# Altium PCB LoRaWAN CO2 measurement Device.PcbDoc
Units mm, origin at the board's own origin, x right, y up, seen from the top; angles counter-clockwise.
Board outline 153.74 x 66.24 mm, 2 copper layers (Top, Bottom); 61 components, 40 nets, 189 pads, 89 vias.
Unrouted connection lines stored in the file: 93.
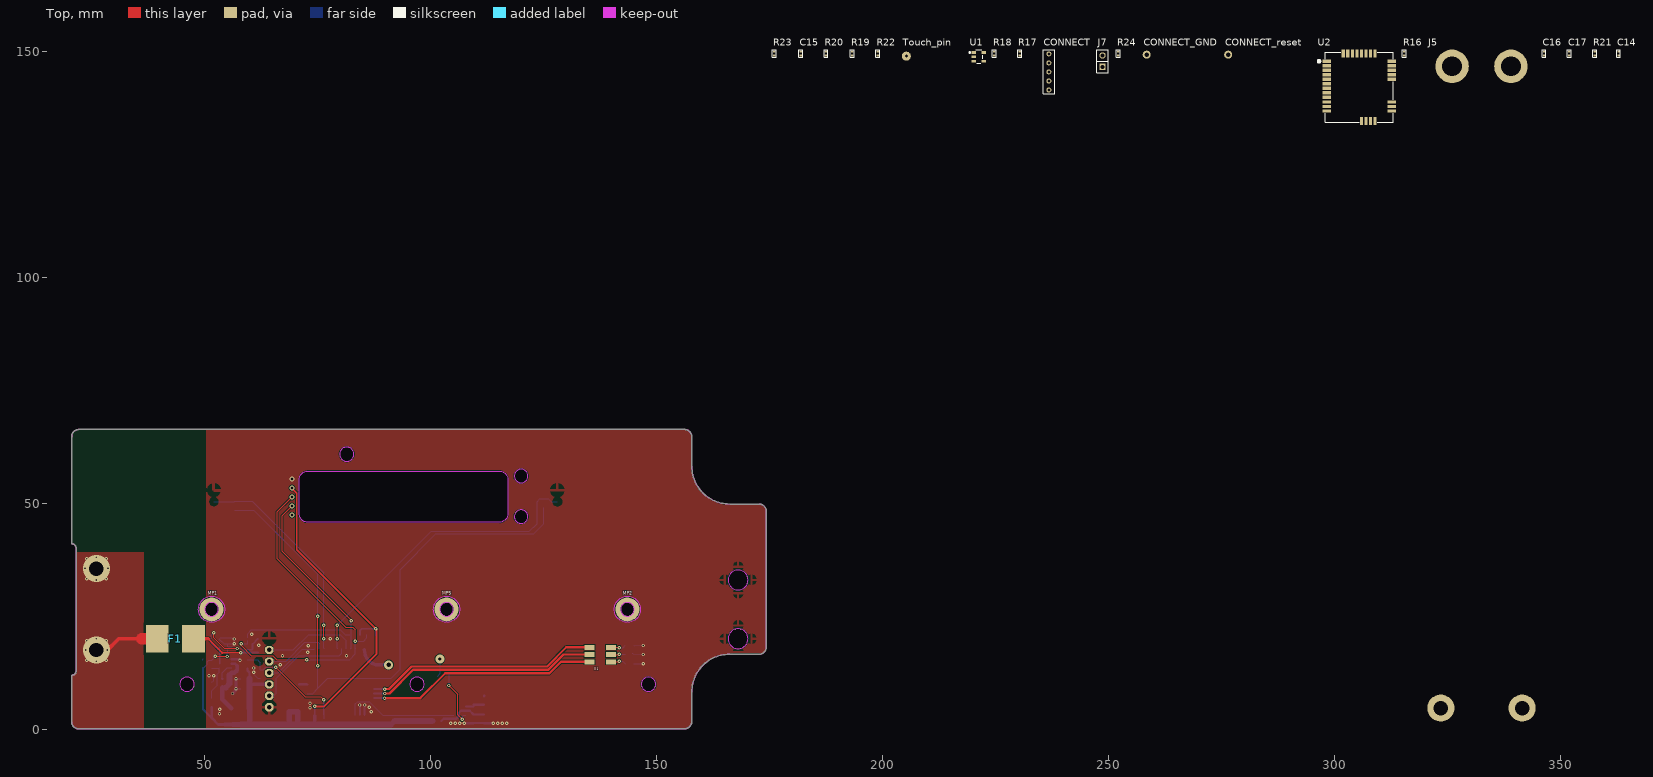
[diagram p0: Top view]
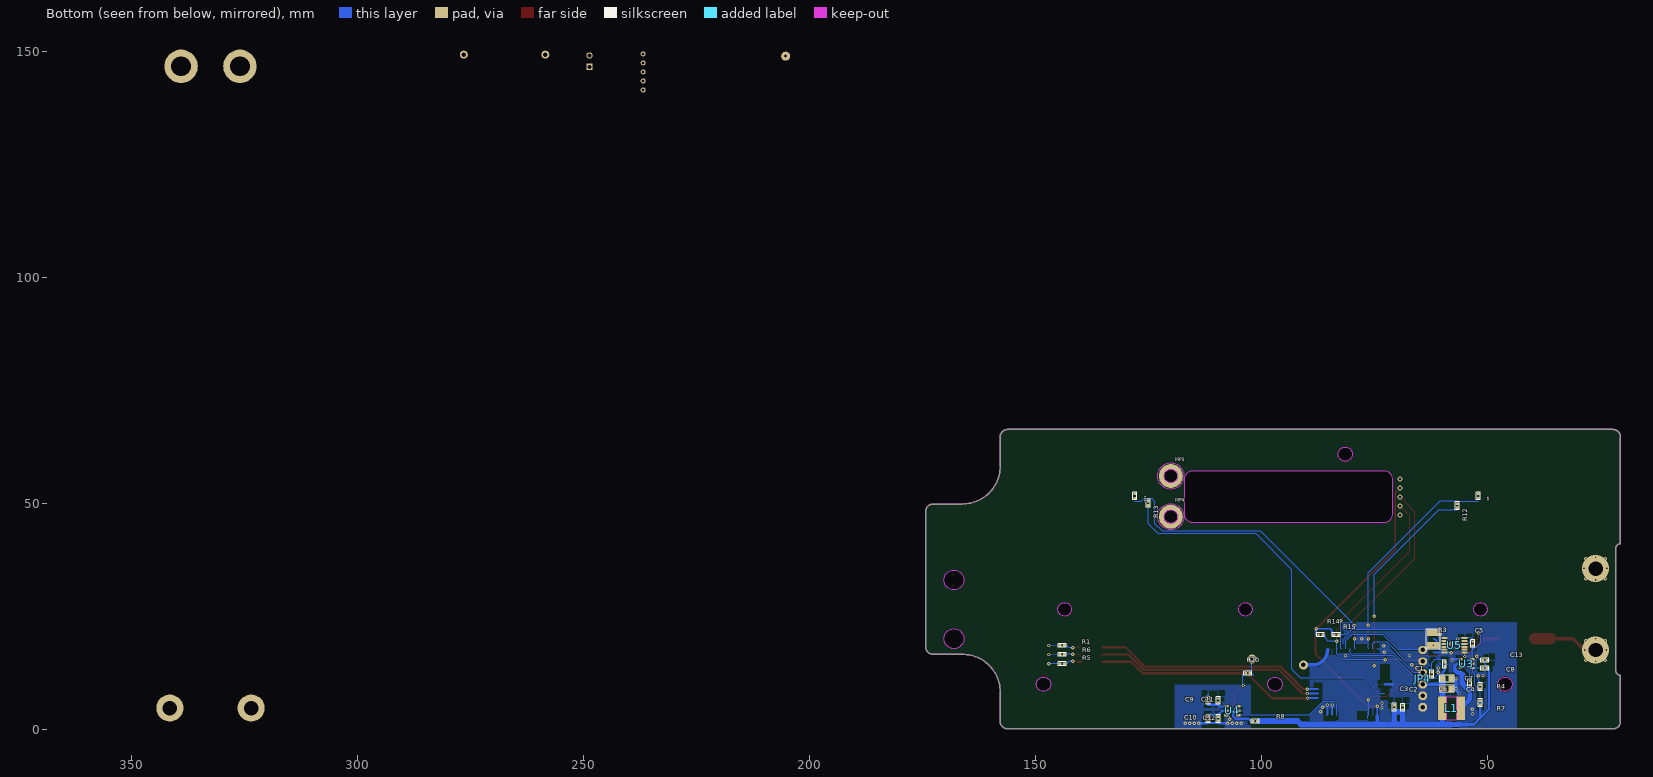
[diagram p1: Bottom view, seen from below]

## Layer stack, top to bottom
Top Solder: solder mask 0.0102, Solder Resist, Dk 3.5
Top: signal copper 0.035
Dielectric 1: dielectric 0.32, FR-4, Dk 4.8
Bottom: signal copper 0.035
Bottom Solder: solder mask 0.0102, Solder Resist, Dk 3.5

## Board outline
21.526,12.914 21.526,39.973 ccw(c20.537,40.011) 20.51,41 20.51,64.611 cw(c22.165,64.646) 22.13,66.3 156.13,66.3 cw(c156.13,64.681) 157.748,64.681 157.748,58.181 ccw(c166.129,58.181) 166.129,49.8 172.63,49.8 cw(c172.63,48.181) 174.249,48.181 174.249,18.181 cw(c172.63,18.181) 172.63,16.562 166.129,16.562 ccw(c166.129,8.181) 157.748,8.181 157.748,1.681 cw(c156.13,1.681) 156.13,0.062 22.13,0.062 cw(c22.129,1.681) 20.51,1.68 20.51,11.938 ccw(c20.561,12.902)
cut-out: 72.821,57.073 115.239,57.073 cw(c115.176,55.232) 117.017,55.168 117.017,47.548 cw(c115.176,47.612) 115.112,45.77 72.694,45.77 cw(c72.758,47.612) 70.916,47.675 70.916,55.295 cw(c72.758,55.232)
cut-out: 168,17.8 ccw(c168,20) 170.2,20 ccw(c168,20) 168,22.2 ccw(c168,20) 165.8,20 ccw(c168,20)
cut-out: 168,30.8 ccw(c168,33) 170.2,33 ccw(c168,33) 168,35.2 ccw(c168,33) 165.8,33 ccw(c168,33)
cut-out: 46.076,8.344 ccw(c46.076,9.931) 47.663,9.931 ccw(c46.076,9.931) 46.076,11.519 ccw(c46.076,9.931) 44.488,9.931 ccw(c46.076,9.931)
cut-out: 81.407,59.245 ccw(c81.407,60.833) 82.995,60.833 ccw(c81.407,60.833) 81.407,62.42 ccw(c81.407,60.833) 79.819,60.833 ccw(c81.407,60.833)
cut-out: 148.184,8.344 ccw(c148.184,9.931) 149.771,9.931 ccw(c148.184,9.931) 148.184,11.519 ccw(c148.184,9.931) 146.596,9.931 ccw(c148.184,9.931)
cut-out: 96.952,8.344 ccw(c96.952,9.931) 98.539,9.931 ccw(c96.952,9.931) 96.952,11.519 ccw(c96.952,9.931) 95.364,9.931 ccw(c96.952,9.931)
cut-out: 103.5,25 ccw(c103.5,26.5) 105,26.5 ccw(c103.5,26.5) 103.5,28 ccw(c103.5,26.5) 102,26.5 ccw(c103.5,26.5)
cut-out: 120,45.5 ccw(c120,47) 121.5,47 ccw(c120,47) 120,48.5 ccw(c120,47) 118.5,47 ccw(c120,47)
cut-out: 51.5,25 ccw(c51.5,26.5) 53,26.5 ccw(c51.5,26.5) 51.5,28 ccw(c51.5,26.5) 50,26.5 ccw(c51.5,26.5)
cut-out: 143.5,25 ccw(c143.5,26.5) 145,26.5 ccw(c143.5,26.5) 143.5,28 ccw(c143.5,26.5) 142,26.5 ccw(c143.5,26.5)
cut-out: 120,54.5 ccw(c120,56) 121.5,56 ccw(c120,56) 120,57.5 ccw(c120,56) 118.5,56 ccw(c120,56)

## Design rules (kind name [scope] priority, off if disabled: settings)
BoardOutlineClearance mdCopperDimension [All] p1: gap=0.254 ignorepadtopadclearanceinfootprint=FALSE except(0: Arc-SplitContinuation Track-SplitContinuation SMDPad-SplitContinuation THPad-SplitContinuation Via-SplitContinuation Fill-SplitContinuation Poly-SplitContinuation Region-SplitContinuation Text-SplitContinuation; 0.152: Poly-OutlineEdge Poly-CavityEdge Poly-CutoutEdge Poly-SplitBarrior)
Clearance "Clearance (Same Net)" [All] p1: gap=0.152 ignorepadtopadclearanceinfootprint=FALSE
Clearance [All] p2: gap=0.152 ignorepadtopadclearanceinfootprint=FALSE
HoleSize [All] p1: absolutevalues=TRUE maxlimit=2540 minlimit=0.3 maxpercent=80.000 minpercent=20.000
HoleToHoleClearance mdDrill [All] p1: gap=0.152 allowstackedmicrovias=TRUE
MinimumSolderMaskSliver [All] p1 off: minsoldermaskwidth=0.254
PasteMaskExpansion Expansion_SMDPaste_OFF [InPadClass('SMDPaste_OFF')] p1: expansion=0
PasteMaskExpansion mlMinCreamFrame [All] p2: expansion=-0.025
PolygonConnect PolygonConnect_For_PolygonThermal_ON_Width160000_Gap250000 [InPolygonClass('PolygonThermal_ON_Width160000_Gap250000') vs Not IsVia] p1: connectstyle=Relief reliefconductorwidth=0.406 reliefentries=4 polygonreliefangle="90 Angle" airgapwidth=0.635
PolygonConnect PolygonConnect_For_PolygonThermal_ON_Width60000_Gap250000 [InPolygonClass('PolygonThermal_ON_Width60000_Gap250000') vs Not IsVia] p2: connectstyle=Relief reliefconductorwidth=0.152 reliefentries=4 polygonreliefangle="90 Angle" airgapwidth=0.635
PolygonConnect PolygonConnect_For_PolygonThermal_ON_Width100000_Gap250000 [InPolygonClass('PolygonThermal_ON_Width100000_Gap250000') vs Not IsVia] p3: connectstyle=Relief reliefconductorwidth=0.254 reliefentries=4 polygonreliefangle="90 Angle" airgapwidth=0.635
PolygonConnect PolygonConnect_For_PolygonThermal_ON_Width240000_Gap250000 [InPolygonClass('PolygonThermal_ON_Width240000_Gap250000') vs Not IsVia] p4: connectstyle=Relief reliefconductorwidth=0.61 reliefentries=4 polygonreliefangle="90 Angle" airgapwidth=0.635
PolygonConnect ThermalVias [IsVia] p5: connectstyle=Direct reliefconductorwidth=0.254 reliefentries=4 polygonreliefangle="90 Angle" airgapwidth=0.254
PolygonConnect [All] p6: connectstyle=Relief reliefconductorwidth=0.254 reliefentries=4 polygonreliefangle="90 Angle" airgapwidth=0.254
RoutingVias [All] p1: holewidth=0.3 width=0.706 viastyle="Through Hole" minholewidth=0.3 minwidth=0.706 maxholewidth=2.54 maxwidth=2.54
SolderMaskExpansion Expansion_SMDSolder_OFF [InPadClass('SMDSolder_OFF')] p1: expansion=0 istentingtop=FALSE
SolderMaskExpansion mlMinStopFrame [All] p2: expansion=0.051 istentingtop=FALSE
Width [All] p1: maxlimit=0.254 minlimit=0.152 preferedwidth=0.152
26 further rules are at their usual default settings.

## Classes and differential pairs
polygon class PolygonThermal_ON_Width160000_Gap250000: Polygon_1_Net_F1
polygon class PolygonThermal_ON_Width60000_Gap250000: Polygon_3_Net_GND
polygon class PolygonThermal_ON_Width100000_Gap250000: Polygon_2_Net_GND
polygon class PolygonThermal_ON_Width240000_Gap250000: Polygon_1_Net_GND
pad class SMDPaste_OFF: MP1-1 MP2-1 MP3-1 MP4-1 MP5-1

## Components (designator, comment, footprint, x,y, rotation, side; value= is the part's Value field where it differs from the comment)
C1 "CAPACITOR NP" sc0402 62.245,12.156 r90 bottom value=100nF
C2 "CAPACITOR NP" sc0402 68.67,4.781 r270 bottom value=100nF
C3 "CAPACITOR NP" sc0402 70.564,4.806 r270 bottom value=1uF
C4 "CAPACITOR NP" sc0402 53.848,10.16 r90 bottom value=100nF
C5 "CAPACITOR NP" sc0402 53.213,18.923 r90 bottom value=100nF
C6 "CAPACITOR NP" sc0805 58.928,8.89 r180 bottom value=22uF
C7 "CAPACITOR NP" sc0805 58.928,11.176 r180 bottom value=22uF
C8 "CAPACITOR NP" sc0402 50.546,13.462 r180 bottom value=100pF
C9 "CAPACITOR NP" sc0402 111.76,6.35 r270 bottom value=1uF
C10 "CAPACITOR NP" sc0402 111.76,2.286 r90 bottom value=1uF
C11 "CAPACITOR NP" sc0402 109.474,6.35 r270 bottom value=100pF
C12 "CAPACITOR NP" sc0402 109.474,2.286 r90 bottom value=100pF
C13 "CAPACITOR NP" sc0402 50.546,15.24 r0 bottom value=10uF
C14 "CAPACITOR NP" sc0402 362.807,149.479 r90 top value=56pF
C15 "CAPACITOR NP" sc0402 181.864,149.479 r90 top value=1uF
C16 "CAPACITOR NP" sc0402 346.329,149.479 r90 top value=2.4pF_NC
C17 "CAPACITOR NP" sc0402 351.917,149.479 r90 top value=2.4pF_NC
CONNECT "J2" circle1*5_0.7_1.106 236.76,141.415 r90 top
CONNECT_GND "J6" circle1*1_1.016_1.788 258.413,149.225 r90 top
CONNECT_reset "J1" circle1*1_1.016_1.788 276.447,149.225 r90 top
D1 "LED-RGBBRG" LED-TRICOLOR-5050 137.5,16.5 r180 top
F1 "0031.7701.11" FUSE_0031.7701.11_SCH 43.5,20 r0 top
J5 "Battery" Battery_Con 332.486,75.66 r90 top
J7 "CONN-2" SIP-2P 248.634,147.796 r90 top value=2PIN
JP4 "PINHD-1X6CB" 1X06-CLEANBIG 64.261,11.188 r90 bottom
L1 "SD14-6R9-R" IND_CB_SD14 57.912,4.572 r180 bottom
MP1 "M2 x 3mm" WA-SMSI_9774030243 51.5,26.5 r0 top
MP2 "M2 x 3mm" WA-SMSI_9774030243 143.5,26.5 r0 top
MP3 "M2 x 3mm" WA-SMSI_9774030243 120,56 r180 bottom
MP4 "M2 x 3mm" WA-SMSI_9774030243 120,47 r180 bottom
MP5 "M2 x 3mm" WA-SMSI_9774030243 103.5,26.5 r0 top
R1 "RESISTOR" sr0402 144,18.5 r0 bottom value=22
R2 "RESISTOR" sr0402 59.436,14.351 r90 bottom value=10K
R3 "RESISTOR" sr1210 61.964,18.537 r90 bottom value=0.1
R4 "RESISTOR" sr0402 51.562,9.398 r90 bottom value=62K
R5 "RESISTOR" sr0402 144,14.5 r0 bottom value=22
R6 "RESISTOR" sr0402 144,16.51 r0 bottom value=51
R7 "RESISTOR" sr0402 51.562,5.842 r270 bottom value=180K
R8 "RESISTOR" sr0402 101.346,1.778 r0 bottom value=41.2
R9 "NTC-RESISTOR" sr0402 52,51.6 r270 bottom value=10K
R10 "RESISTOR" sr0402 102.997,12.319 r180 bottom value=470
R11 "NTC-RESISTOR" sr0402 128,51.6 r270 bottom value=10K
R12 "RESISTOR" sr0402 56.642,49.403 r270 bottom value=10K
R13 "RESISTOR" sr0402 125,50 r270 bottom value=10K
R14 "RESISTOR" sr0402 86.868,20.86 r0 bottom value=10K
R15 "RESISTOR" sr0402 83.376,20.86 r0 bottom value=10K
R16 "RESISTOR" sr0402 315.373,149.479 r90 top value=2K
R17 "RESISTOR" sr0402 230.283,149.479 r90 top value=1M
R18 "RESISTOR" sr0402 224.695,149.479 r90 top value=1M
R19 "RESISTOR" sr0402 193.294,149.479 r90 top value=0
R20 "RESISTOR" sr0402 187.452,149.479 r90 top value=0
R21 "RESISTOR" sr0402 357.505,149.479 r90 top value=0
R22 "RESISTOR" sr0402 198.882,149.479 r90 top value=1M
R23 "RESISTOR" sr0402 176.022,149.479 r90 top value=1M
R24 "RESISTOR" sr0402 252.095,149.479 r90 top value=10K
Touch_pin "J3" circle1*1_0.7 205.232,148.907 r90 top
U1 "TLV840" TLV840_SOT-23-5_L2.9-W1.6-P0.95-LS2.8-BR 220.154,149.701 r0 top
U2 "RAK3172" RAK3172 305.435,142.018 r0 top
U3 "AP63200WU-7" TSOT26_DIO 54.61,14.478 r0 bottom
U4 "IQS228B00000000TSR" TSOT23-6_AZQ 106.426,4.064 r0 bottom
U5 "LTC2945IMSTRPBF" MSOP-12_MS_LIT 57.277,18.542 r0 bottom

## Footprints (in the part's own frame and the unit in brackets; to place one, negate y for a bottom-side part, rotate by r counter-clockwise, add the part's x,y. Pads: shape width x height; smd on the part's side, far side on the other; paste and mask are expansions set on the pad)
1X06-CLEANBIG [mil] "1X06-CLEANBIG"
  oct 70x70 / inner round 64.67 / far side oct 70x70 hole 40: 1(-250,0) 2(-150,0) 3(-50,0) 4(50,0) 5(150,0) 6(250,0)
  body extent -283,-33 283,33, height 50
Battery_Con [mm] "Battery"
  round 6 hole 3.2: 1(-71,8.999) 2(-71,-8.999)
  round 7.4 hole 4.4: 3(71,-6.501) 4(71,6.499)
circle1*1_0.7 [mm]
  round 2 / inner round 1.106 / far side round 2 hole 0.7 mask+0.102: 1(0,0)
circle1*1_1.016_1.788 [mil]
  round 70 hole 40: 1(0,0)
circle1*5_0.7_1.106 [mm]
  round 1.106 hole 0.7: 1(0,0) 2(2,0) 3(4,0) 4(6,0) 5(8,0)
  silkscreen extent -0.87,-1.27 8.88,1.27
FUSE_0031.7701.11_SCH [mil] "FUSE_0031.7701.11_SCH"
  rect 197x236 smd: 1(-157.48,0) 2(157.48,0)
  body extent -256,-118 256,118, height 150
IND_CB_SD14 [mil] "IND_CB_SD14"
  rect 73x205 smd: 1(-80,0) 2(80,0)
  Top keep-out region: -42,103 42,103 42,-103 -42,-103
  Top keep-out region: -42,101 42,101 42,-101 -42,-101
  body extent -117,-103 117,103, height 150
LED-TRICOLOR-5050 [mm] "LED-TRICOLOR-5050"
  rect 2.2x1.1 smd: 1(-2.4,1.6) 2(-2.4,0) 3(-2.4,-1.6) 4(2.4,-1.6) 5(2.4,0) 6(2.4,1.6)
  body extent -3.5,-2.57 3.5,2.57, height 3.81
MSOP-12_MS_LIT [mil] "MSOP-12_MS_LIT"
  rect 52.5x17 smd: 1(-87.25,64) 2(-87.25,38.4) 3(-87.25,12.8) 4(-87.25,-12.8) 5(-87.25,-38.4) 6(-87.25,-64) 7(87.25,-64) 8(87.25,-38.4) 9(87.25,-12.8) 10(87.25,12.8) 11(87.25,38.4) 12(87.25,64)
  body extent -114,-72 114,72, height 50
RAK3172 [mm]
  rect 1.8x0.75 smd: 1(-7.2,5.75) 2(-7.2,4.75) 3(-7.2,3.75) 4(-7.2,2.75) 5(-7.2,1.75) 6(-7.2,0.75) 7(-7.2,-0.25) 8(-7.2,-1.25) 9(-7.2,-2.25) 10(-7.2,-3.25) 11(-7.2,-4.25) 12(-7.2,-5.25) 17(7.2,-5.25) 18(7.2,-4.25) 19(7.2,-3.25) 20(7.2,1.75) 21(7.2,2.75) 22(7.2,3.75) 23(7.2,4.75) 24(7.2,5.75)
  rect 0.75x1.8 smd: 13(0.5,-7.45) 14(1.5,-7.45) 15(2.5,-7.45) 16(3.5,-7.45) 25(3.5,7.45) 26(2.5,7.45) 27(1.5,7.45) 28(0.5,7.45) 29(-0.5,7.45) 30(-1.5,7.45) 31(-2.5,7.45) 32(-3.5,7.45)
  silkscreen extent -9.14,-7.75 7.5,7.75
sc0402 [mil] "SC0402"
  rect 20x22 smd: 1(-17.5,0) 2(17.5,0)
  silkscreen extent -34,-17 34,17, body extent -20,-10 20,10, height 20
sc0805 [mil] "SC0805"
  rect 45x50 smd mask+4: 1(35,0)
  rect 45x50 smd: 2(-35,0)
  silkscreen extent -63,-30 63,30, body extent -39,-25 39,25, height 33
SIP-2P [mil] "SIP-2P"
  rect 55x55 hole 36: 1(-50,0)
  round 55 hole 36: 2(50,0)
  silkscreen extent -100,-50 100,50
sr0402 [mil] "SR0402"
  rect 20x22 smd mask+2: 1(-17.5,0) 2(17.5,0)
  silkscreen extent -34,-17 34,17, body extent -20,-10 20,10, height 14
sr1210 [mil]
  rect 55x111 smd: 1(0,0) 2(110,0)
  silkscreen extent -33,-60 142,60
TLV840_SOT-23-5_L2.9-W1.6-P0.95-LS2.8-BR [mm]
  rect 1x0.6 smd paste+0 mask+0.05: 1(0,0) 2(0,-0.95) 3(0,-1.9) 4(2.2,-1.9) 5(2.2,0)
  silkscreen extent -1.06,-2.35 1.99,0.57
TSOT23-6_AZQ [mil] "TSOT23-6_AZQ"
  rect 39.5x22 smd: 1(-53.25,37.4) 2(-53.25,0) 3(-53.25,-37.4) 4(53.25,-37.4) 5(53.25,0) 6(53.25,37.4)
  body extent -73,-48 73,48, height 50
TSOT26_DIO [mil] "TSOT26_DIO"
  rect 35.5x20 smd: 1(-51.25,37.4) 2(-51.25,0) 3(-51.25,-37.4) 4(51.25,-37.4) 5(51.25,0) 6(51.25,37.4)
  body extent -69,-47 69,47, height 50
WA-SMSI_9774030243 [mm] "WA-SMSI_9774030243"
  rrect100% 5.3x5.3 smd paste+0: 1(0,0)
  Top keep-out region: 0,2.9 1.11,2.679 2.051,2.051 2.679,1.11 2.9,0 2.9,0 2.679,-1.11 2.051,-2.051 1.11,-2.679 0,-2.9 0,-2.9 -1.11,-2.679 -2.051,-2.051 -2.679,-1.11 -2.9,0 -2.9,0 -2.679,1.11 -2.051,2.051 -1.11,2.679 0,2.9
  body extent -2.85,-2.85 2.85,2.85, height 3.81

## Part data
C1 C2 C4 C5: library part 08070561, "Capacitor-10V-100nF-±10%-X5R -0402", MANUFACTURER=YAGEO, Part Number=CC0402KRX5R6BB104, TOLERANCE=±10%, VOLTAGE=10V, Classification="SMD Ceramic Capacitor", CODE=08070561, RAK Code=K3CA10402KA402, SYMNAME=CAP
C3 C9 C10 C15: library part 08070612, "Capacitor-10V-1uF-±10%-X5R-0402", MANUFACTURER=YAGEO, Part Number=CC0402KRX5R6BB105, TOLERANCE=±10%, VOLTAGE=10V, Classification="SMD Ceramic Capacitor", CODE=08070612, RAK Code=KRAKBJ08070612, SYMNAME=CAP
C6 C7: library part 0807B024, "Capacitor-25V-22uF-±20%-X5R-0805", MANUFACTURER=MURATA, Part Number=GRM21BR61E226ME44L, TOLERANCE=±20%, VOLTAGE=25V, Classification="SMD Ceramic Capacitor", CODE=0807B024, RAK Code=KRAKBJ0807B024, SYMNAME=CAP
C8 C11 C12: library part 08070450, "Capacitor-50V-100pF-±5%-NPO-0402", MANUFACTURER=YAGEO, Part Number=CC0402JRNPO9BN101, TOLERANCE=±5%, VOLTAGE=50V, Classification="SMD Ceramic Capacitor", CODE=08070450, RAK Code=KRAKBJ08070450, SYMNAME=CAP
C13: library part 0807C004, "Capacitor-10V-10uF-±20%-X5R-0402", MANUFACTURER=YAGEO, Part Number=CC0402MRX5R6BB106, TOLERANCE=±20%, VOLTAGE=10V, Classification="SMD Ceramic Capacitor", CODE=0807C004, RAK Code=KRAKBJ0807C004, SYMNAME=CAP
C14: library part 0807C002, "Capacitor-50V-56pF-±5%-COG-0402", MANUFACTURER=Murata, Part Number=GRM1555C1H560JA01D, TOLERANCE=±5%, VOLTAGE=50V, Classification="SMD Ceramic Capacitor", CODE=0807C002, RAK Code=K3CA56006JA402, SYMNAME=CAP
C16 C17: library part 0807A00M, "Capacitor-50V-2.4pF-±0.1pF-COG-0402", MANUFACTURER=MuRATA, Part Number=GRM1555C1H2R4BA01D, TOLERANCE=±0.1pF, VOLTAGE=50V, Classification="SMD Ceramic Capacitor", CODE=0807A00M, RAK Code=KRAKBJ0807A00M, SYMNAME=CAP
CONNECT: library part CONNECT
CONNECT_GND CONNECT_reset Touch_pin: library part CONNECT_1
D1: "LED-RGB  6 pin RGB LED (no common connector)     Packages:   PLCC-6  LED-TRICOLOR-5050 - No built-in IC    SparkFun Products:", DeviceName=BRG, DeviceSetName=LED-RGB, GateName_1=G$1, LibraryName=SparkFun-LED, PROD_ID=DIO-16048, SymbolName_1=LED-RGB-INDV
F1: MFR_NAME="Schurter Inc", COPYRIGHT="Copyright (C) 2024 Ultra Librarian. All rights reserved.", DeviceSetName=0031.7701.11, GateName_1=A, LibraryName=fusible, MANUFACTURER_PART_NUMBER=0031.7701.11, SymbolName_1=FUSE
J7: library part 14050028, "Conn Header-Male Pin-1*2Pos-Straight-PH2.54-Through Hole-Pole3.0mm-Mating6mm-Body2.54mm", MANUFACTURER=STZ01, Part Number=ST-PH-254-0087, Classification="Male and Female Header", CODE=14050028, RAK Code=KRAKBJ14050028
JP4: "PIN HEADER", DeviceName=CB, DeviceSetName=PINHD-1X6, GateName_1=A, LibraryName=holes_no_keep, SymbolName_1=PINHD6
L1: MFR_NAME="Eaton / Cooper Bussmann", COPYRIGHT="Copyright (C) 2024 Ultra Librarian. All rights reserved.", DeviceSetName=SD14-6R9-R, GateName_1=A, LibraryName=inductor_eaton_6.9uh, MANUFACTURER_PART_NUMBER=SD14-6R9-R, SymbolName_1=IND
MP1 MP2 MP3 MP4 MP5: library part WA-SMSI_9774XXX243_9774030243R, "WA-SMSI SMT Steel Spacer, M2 Thread Internal  Applications    Assembling of PCBs to housing and to other PCBs   For Distances from 1 to 8 mm   Fast and precise process   Strong holding forces and torques   Highest process reliability   Instant removable Polyimide Tape   Properties   Material Steel  Surface Tin  Ti M2  Solder Paste Thickness 150 碌m  Tightening Torque (Value) 0.2 N*m   General Information   Operating Temperature -55 up to +150 掳C       Details see: https://www.we-online.com/katalog/en/SMSI_SMT_STEEL_SPACER_M2_THREAD_INTERNAL   Updated by Ella Wu  2020-06-03 2021(C) Wurth Elektronik", DATASHEET-URL=https://www.we-online.com/catalog/datasheet/9774030243R.pdf, DeviceName=_9774030243R, DeviceSetName=WA-SMSI_9774XXX243, GateName_1=G$1, INNER-DIAMETER=2.8mm, INNER-THREAD-LENGTH=-, LibraryName=Eagle_WA-SMSI_rev21a, OUTER-DIAMETER=4.35mm, PART-NUMBER=9774030243R, PIN-LENGTH=3mm, SymbolName_1=WA-SMSI, THREAD=M2
R1 R5: library part 07090803, "Resistor-1/16W-22Ω-±5%-0402", MANUFACTURER=YAGEO, Part Number=RC0402JR-0722RL, TOLERANCE=±5%, Classification="Thick Film Resistor", CODE=07090803, RAK Code=KRAKBJ07090803
R2 R12 R13 R14 R15 R24: library part 07090867, "Resistor-1/16W-10KΩ-±1％-0402", MANUFACTURER=YAGEO, Part Number=RC0402FR-0710KL, TOLERANCE=±1%, Classification="Thick Film Resistor", CODE=07090867, RAK Code=K3RS01031FA402
R3: library part 0709C03J, "Resistor-1/2W-100mΩ-±1％-1210", MANUFACTURER=PANSONIC, Part Number=ERJ-14BSFR10U, TOLERANCE=±1%, Classification="Thick Film Resistor", CODE=0709C03J, RAK Code=KRAKBJ0709C03J
R4: library part 0709B003, "Resistor-1/16W-62KΩ-±1%-0402", MANUFACTURER=YAGEO, Part Number=RC0402FR-0762KL, TOLERANCE=±1%, Classification="Thick Film Resistor", CODE=0709B003, RAK Code=KRAKBJ0709B003
R6: library part 0709C00E, "Resistor-1/16W-51Ω-±5%-0402", MANUFACTURER=YAGEO, Part Number=RC0402JR-0751RL, TOLERANCE=±5%, Classification="Thick Film Resistor", CODE=0709C00E, RAK Code=KRAKBJ0709C00E
R7: library part 0709C01F, "Resistor-1/16W-180KΩ-±1%-0402", MANUFACTURER=YAGEO, Part Number=RC0402FR-07180KL, TOLERANCE=±1%, Classification="Thick Film Resistor", CODE=0709C01F
R8: library part 0709B01P, "Resistor-1/16W-41.2Ω-±1%-0402", MANUFACTURER=YAGEO, Part Number=RC0402FR-0741R2L, TOLERANCE=±1%, Classification="Thick Film Resistor", CODE=0709B01P, RAK Code=KRAKBJ0709B01P
R9 R11: library part 0705B001, "NTC Thermistor-10KΩ ±1％-B(25-50℃) 3380K-0402", MANUFACTURER=MURATA, Part Number=NCP15XH103F03RC, TOLERANCE=±1%, Classification="NTC Resistor", CODE=0705B001, RAK Code=KRAKBJ0705B001
R10: library part 0709C00L, "Resistor-1/16W-470Ω-±1%-0402", MANUFACTURER=YAGEO, Part Number=RC0402FR-07470RL, TOLERANCE=±1%, Classification="Thick Film Resistor", CODE=0709C00L, RAK Code=KRAKBJ0709C00L
R16: library part 0709C007, "Resistor-1/16W-2KΩ-±1%-0402", MANUFACTURER=YAGEO, Part Number=RC0402FR-072KL, TOLERANCE=±1%, Classification="Thick Film Resistor", CODE=0709C007, RAK Code=K3RS02021FA402
R17 R18 R22 R23: library part 0709C00Y, "Resistor-1/16W-1MΩ-±1％-0402", MANUFACTURER=YAGEO, Part Number=RC0402FR-071ML, TOLERANCE=±1%, Classification="Thick Film Resistor", CODE=0709C00Y, RAK Code=KRAKBJ0709C00Y
R19 R20 R21: library part 07090800, "Resistor-0Ω-1A-50mΩMAX-0402", MANUFACTURER=YAGEO, Part Number=RC0402JR-070RL, TOLERANCE="< 50mΩ", Classification="Thick Film Resistor", CODE=07090800, RAK Code=K3RS00001JA402
U3: MFR_NAME="Diodes Inc", COPYRIGHT="Copyright (C) 2024 Ultra Librarian. All rights reserved.", DeviceSetName=AP63200WU-7, GateName_1=A, LibraryName=AP63200, MANUFACTURER_PART_NUMBER=AP63200WU-7, SymbolName_1=AP63200WU-7, TYPE="Power Management"
U4: MFR_NAME=Azoteq, COPYRIGHT="Copyright (C) 2024 Ultra Librarian. All rights reserved.", DeviceSetName=IQS228B00000000TSR, GateName_1=A, LibraryName=Azeto, MANUFACTURER_PART_NUMBER=IQS228B00000000TSR, SymbolName_1=IQS228B_TS, TYPE=Interface
U5: MANUFACTURER_PART_NUMBER=LTC2945IMS#TRPBF, MFR_NAME="Analog Devices Inc", COPYRIGHT="Copyright (C) 2025 Ultra Librarian. All rights reserved.", DeviceSetName=LTC2945IMSTRPBF, GateName_1=A, LibraryName=ltc2945, SymbolName_1=LTC2945IMSTRPBF
U2: CODE=6310C01L

## Free pads (board coordinates)
  round 3 hole 3 unplated: MH1(51.5,26.5) MH1(103.5,26.5) MH1(120,47) MH1(120,56) MH1(143.5,26.5)
  round 3.175 hole 3.175 unplated: MH1(81.407,60.833) MH2(148.184,9.931) MH3(96.952,9.931) MH4(46.076,9.931)
  round 4.4 hole 4.4 unplated: MH1(168,20) MH1(168,33)

## Via types
v1: diameter 0.756/0.756 (per signal layer), hole 0.35, Top to Bottom, 80 vias
v2: diameter 1.106/1.106 (per signal layer), hole 0.7, Top to Bottom, 5 vias
v3: diameter 6/6 (per signal layer), hole 3.2, Top to Bottom, 2 vias
v4: diameter 2/2 (per signal layer), hole 0.7, Top to Bottom, 1 vias
v5: diameter 2/2 (per signal layer), hole 1, Top to Bottom, 1 vias

## Nets (pads, with @x,y where several pads share a name; then routed paths per layer and width w, separated by ;. In a path a pad name is that pad's centre, name@x,y a point inside that pad or via, vN(x,y) a via of type N, cw(c..) or ccw(c..) an arc to the next point about the centre after c; other vN are vias at no path point)
BOOT: J7.2 R24.1 U2.21
CVIN: F1.2 R3.2 U5.12 | length 15.9
  Top w0.406: 53.848,16.891 55.626,16.891 v1@57.887,16.891
  Top w0.508: 50.739,20 53.848,16.891
  Top w0.61: v1@57.887,16.891 v1(57.912,16.916) v1@57.888,16.892
  Top w0.813: F1.2 50.739,20
  Bottom w0.254: 61.765,16.916 61.964,17.115
  Bottom w0.406: v1(57.912,16.916) U5.12 61.765,16.916
CX1: R10.1 Touch_pin.1
DC_RESET: U1.1 U3.2
GND: C1.2 C2.2 C3.1 C5.2 C6.1 C7.1 C9.1 C10.1 C11.1 C12.1 C13.1 C15.1 C16.1 C17.1 CONNECT.1 CONNECT_GND.1 J5.3 J5.4 JP4.1 R1.1 R4.1 R5.1 R6.1 R9.2 R11.2 R19.1 R20.1 R23.1 R24.2 U1.3 U2.11 U2.17 U2.18 U2.28 U3.4 U4.2 U5.3 U5.4 U5.6 | length 37.3
  Bottom w0.152: 144.95,14.5 144.972,14.478 v1(147,14.5) ; 144.95,18.5 144.972,18.479 v1(147,18.5) ; v1(147,16.5) 144.95,16.51 ; 144.95,16.51 144.632,16.828 144.558,16.828 144.875,16.51 144.95,16.51
  Bottom w0.254: 49.53,15.568 49.596,15.502 49.596,15.24 ; 51.562,10.348 51.95,10.736 v1(51.95,11.76) ; 53.213,19.873 53.246,19.906 ; v1(56.896,8.89) C6.1@57.978,8.89 ; v1(56.896,11.176) C7.1@57.978,11.176 ; v1(60.833,12.573) 60.833,12.09 61.717,11.206 62.245,11.206 ; 53.246,19.906 54.285,18.867 U5.4 ; 53.246,19.906 53.508,20.168 U5.6 55.086,20.193 56.007,20.193 56.261,19.939 v1(56.515,19.939) v1(56.515,18.923) ; U5.4 56.459,18.867 v1(56.515,18.923) ; U5.4 U5.3 55.951,18.217 56.515,18.781 v1(56.515,18.923)
  Bottom w0.406: v1(60.833,12.573) v1(60.833,13.525)
  Bottom w0.508: U3.4 57.597,15.428 v1(57.785,15.24) ; v1(107.442,1.27) 109.408,1.27 109.474,1.336 111.76,1.336 111.826,1.27 v1(113.792,1.27) ; 111.76,7.3 111.826,7.366
  Bottom w0.75: v1(56.134,7.874) 56.896,8.636 v1(56.896,8.89) v1(56.896,11.176)
  other v1: 104.394,1.27 105.41,1.27 106.426,1.27 114.808,1.27 115.824,1.27 116.84,1.27 53.245,3.397 86.868,3.81 53.276,4.381 73.279,4.763 86.36,4.826 73.279,5.715 50.927,11.811 66.675,14.224 81.343,16.192 67.183,16.256 72.739,16.986 72.866,18.415 61.912,18.542 77.724,19.971 60.42,21.018
  other v2: 69.27,55.349
LEDB: D1.6 U2.16 | length 51
  Top w0.508: v1(89.757,6.858) 97.663,6.858 103.188,12.383 126.286,12.383 128.804,14.9 D1.6
  Bottom w0.508: 87.453,6.876 89.739,6.876 v1(89.757,6.858)
LEDG: D1.4 U2.14 | length 51.5
  Top w0.508: v1(89.821,8.858) 90.742,8.858 95.758,13.875 125.762,13.875 129.987,18.1 D1.4
  Bottom w0.508: 87.453,8.876 89.803,8.876 v1(89.821,8.858)
LEDR: D1.5 U2.15 | length 51.2
  Top w0.508: v1(89.789,7.874) 90.837,7.874 96.125,13.162 126.057,13.162 129.395,16.5 D1.5
  Bottom w0.508: 87.453,7.876 89.787,7.876 v1(89.789,7.874)
NetA1_1: C16.2 R21.2
NetC4_1: C4.1 U3.6
NetC4_2: C4.2 L1.2 U3.5
NetC8_1: C8.1 R4.2 R16.1 U3.1
NetC9_2: C9.2 C11.2 U4.4 | length 4.4
  Bottom w0.508: U4.4 109.474,5.014 109.474,5.4 111.76,5.4
NetC10_2: C10.2 C12.2 R8.1 U4.5 | length 11.2
  Bottom w0.508: 102.296,1.778 102.804,2.286 105.664,2.286 105.754,2.376 105.765,2.376 106.172,2.782 106.172,3.556 106.68,4.064 U4.5 108.646,4.064 109.474,3.236 111.76,3.236
NetC14_1: C14.1 C17.2 R21.1
NetC15_2: C15.2 R18.1 R22.2 U1.2
NetD1_1: D1.1 R5.2 | length 5.2
  Top w0.254: v1(141.7,15.027) 141.573,14.9 D1.1 ; D1.1 140.132,14.668 140.621,14.668 140.389,14.9 D1.1
  Top w0.508: D1.1 D1.1@140.027,15.027
  Bottom w0.254: v1(141.7,15.027) 142.523,15.027 143.05,14.5
NetD1_2: D1.2 R6.2 | length 3.2
  Top w0.254: D1.2 141.658,16.5 v1(141.7,16.542)
  Bottom w0.254: v1(141.7,16.542) 141.732,16.51 143.05,16.51
NetD1_3: D1.3 R1.2 | length 3.4
  Top w0.254: D1.3 141.636,18.1 v1(141.7,18.037)
  Bottom w0.254: v1(141.7,18.037) 142.586,18.037 143.05,18.5
NetF1_1: F1.1 J5.1 J5.2 | length 12.1
  Top w0.813: v1(28.448,17.5) 30.956,20.008 36.047,20.008 36.056,20
  Top w2.54: 36.056,20 F1.1
  other v1: 26,15 23.876,15.24 28.194,15.24 23.622,17.5 23.876,19.558 28.194,19.558 26,20
  other v3: 26,17.5
NetR7_2: R7.2 R16.2
NetR10_2: R10.2 U4.6 | length 13.1
  Top w0.254: v1(104.013,9.652) 105.918,7.747 105.918,3.18 v1(106.92,2.178)
  Bottom w0.254: 103.947,12.319 104.074,12.192 104.074,9.713 v1(104.013,9.652) ; v1(106.92,2.178) 106.92,2.78 107.188,3.048 107.779,3.048 U4.6
NetR17_1: R17.1 R18.2
NetR19_2: R19.2 U1.5
NetR20_2: R20.2 U1.4
NetR22_1: R22.1 R23.2
OUT: U2.19 U4.1 | length 25.8
  Bottom w0.254: 83.318,3.031 83.312,3.037 83.312,5.588 83.82,6.096 86.36,6.096 89.342,3.114 U4.1
RESET: C1.1 CONNECT_reset.1 R2.2 U2.22
RF: C14.2 U2.12
RX2: JP4.4 U2.1 | length 12.3
  Bottom w0.254: JP4.4 66.293,12.458 71.539,17.704 74.191,17.704 74.318,17.831
SCL: CONNECT.4 R15.1 U2.9 U5.7 | length 63.4
  Top w0.254: v2(69.27,49.349) 67.12,47.199 67.12,39.37 82.359,24.13 v1(82.359,23.971)
  Bottom w0.254: U5.7 59.493,21.139 60.325,21.971 80.01,21.971 81.121,20.86 82.376,20.86 ; 82.318,17.831 82.376,17.889 82.376,20.86 ; v1(82.359,23.971) 82.359,20.876 82.376,20.86
  Bottom w0.305: 82.296,17.853 82.318,17.831
SDA: CONNECT.3 R14.1 U2.10 U5.8 U5.9 | length 77.4
  Top w0.254: v1(58.039,18.923) 58.039,18.542 60.325,16.256 65.024,16.256 65.913,15.367 v1(72.517,15.367) ; v2(69.27,51.349) 66.008,48.088 66.008,37.719 81.185,22.543 82.709,22.543 83.312,21.939 83.312,19.463 v1(83.28,19.431)
  Bottom w0.254: v1(58.039,18.923) 59.437,18.923 U5.9 U5.8 ; v1(72.517,15.367) 82.042,15.367 83.318,16.643 83.318,17.831 ; 83.28,17.869 v1(83.28,19.431) 85.122,19.431 85.868,20.177 85.868,20.86
  Bottom w0.305: 83.28,17.869 83.318,17.831
SWCLK: JP4.6 U2.8 | length 20.7
  Bottom w0.254: JP4.6 69.608,17.538 72.993,20.923 79.947,20.923 81.318,19.552 81.318,17.831
SWDIO: JP4.2 U2.7 | length 22.9
  Bottom w0.254: JP4.2 65.278,7.378 ; 65.29,7.378 65.278,7.378 ; 80.318,17.831 80.318,16.818 79.756,16.256 70.818,16.256 65.786,11.224 65.786,7.886 65.278,7.378
THERMISTORA: R9.1 R12.2 U2.3 | length 47.7
  Top w0.254: v1(76.3,20) v1(76.3,23)
  Bottom w0.254: 52,50.33 56.569,50.33 56.642,50.403 60.5,50.403 76.3,34.603 v1(76.3,23) ; v1(76.3,20) 76.3,17.849 76.318,17.831
THERMISTORB: R11.1 R13.2 U2.26 | length 68.6
  Top w0.254: v1(79.3,20) v1(79.3,23)
  Bottom w0.254: v1(79.3,20) 79.3,17.849 79.318,17.831 ; v1(79.3,23) 100.083,43.783 121.825,43.783 123.507,45.466 123.507,50.355 124.152,51 125,51 124.999,50.997 126.031,50.997 126.698,50.33 128,50.33
TX2: JP4.5 U2.2 | length 14
  Bottom w0.254: JP4.5 67.971,14.998 72.149,19.177 75.057,19.177 75.318,18.916 75.318,17.831
VCC: C2.1 C3.2 C6.2 C7.2 C8.2 C13.2 CONNECT.2 J7.1 JP4.3 L1.1 R2.1 R7.1 R8.2 R14.2 R15.2 U2.24 U5.1 U5.2 | length 172.4
  Top w0.254: v1(52.356,16.097) 54.959,16.097 v1(54.991,16.066)
  Top w0.406: v2(69.27,53.349) 69.27,53.312 70.359,52.224 70.359,39.687 v1(87.852,22.193) 88.011,22.034 88.011,16.637 76.391,5.016 v1(74.327,5.016)
  Bottom w0.2: 49.596,13.462 49.657,13.462 50.546,14.351 50.546,14.359 50.551,14.364 50.551,14.891 50.9,15.24 51.496,15.24
  Bottom w0.254: 49.53,13.396 49.596,13.462 ; 51.496,15.24 v1(52.356,16.097) v1(52.356,16.097) ; v1(54.991,16.066) 54.991,16.916 U5.1 U5.2
  Bottom w0.305: U5.1@54.991,16.847 U5.1
  Bottom w0.406: 74.318,3.031 74.327,3.04 v1(74.327,5.016) ; 84.375,20.86 84.36,20.875 84.36,21.844 84.709,22.193 v1(87.852,22.193) 87.868,22.178 87.868,20.86
  Bottom w0.508: 49.596,13.462 49.596,4.379 51.562,2.413 51.562,4.892 51.496,4.826 ; 59.436,13.401 59.436,12.954 59.878,12.512 C7.2@59.878,11.176 ; L1.1@59.753,5.21 L1.1@59.878,5.334
  Bottom w0.61: 51.562,2.413 52.959,1.016 54.483,1.016 ; 74.318,1.12 74.422,1.016
  Bottom w0.7: 74.318,1.12 74.318,3.031
  Bottom w0.75: 60.12,9.918 JP4.3
  Bottom w0.813: 54.483,1.016 56.134,1.016
  Bottom w1.016: 56.134,1.016 58.039,1.016
  Bottom w1.27: 58.039,1.016 59.817,1.016 ; L1.1@59.817,4.699 L1.1 ; C7.2@59.878,11.176 59.878,10.16 ; L1.1@59.944,3.048 L1.1 ; 60.12,9.918 59.878,10.16 ; 100.396,1.778 91.948,1.778 91.186,1.016 74.422,1.016 70.485,1.016 ; 59.817,1.016 59.944,1.143 L1.1 ; 59.817,1.016 68.453,1.016 ; 59.878,10.16 59.878,8.89 59.878,5.334 59.878,4.638 L1.1 ; 68.453,1.016 68.67,1.233 68.67,3.831 70.539,3.831 70.564,3.856 70.564,1.095 70.485,1.016 ; 68.453,1.016 70.485,1.016
VCCTHERMISTORS: R12.1 R13.1 U2.6 | length 133.8
  Top w0.254: v1(75,14) v1(75,25)
  Bottom w0.254: 56.642,48.403 60.88,48.403 74.993,34.29 74.993,25.007 v1(75,25) ; 72.653,7.876 73.853,7.876 75,9.024 ; v1(75,14) 75,9.024 ; 125,49 125,45.731 124.948,45.43 122.729,43.212 101.124,43.212 93.218,35.306 93.218,13.208 91.218,11.208 77.184,11.208 75,9.024
VIN: C5.1 R3.1 R17.2 U3.3 U5.11 | length 22.8
  Top w0.254: v1(51.943,21.304) 51.943,20.193 54.292,17.843 v1(57.182,17.843)
  Bottom w0.254: v1(51.943,21.304) 51.435,20.796 51.435,18.986 52.448,17.973 53.213,17.973 52.8,17.56 ; v1(57.182,17.843) 58.007,17.843 58.284,17.567 U5.11 ; 61.742,19.959 61.964,19.959
  Bottom w0.406: 53.308,14.478 U3.3 53.308,17.653 53.213,17.748 53.213,17.973 53.308,17.878 ; U5.11 60.366,17.567 60.579,17.78 60.579,18.796 61.742,19.959
pads on no net: CONNECT.5 MP1.1 MP2.1 MP3.1 MP4.1 MP5.1 U2.4 U2.5 U2.13 U2.20 U2.23 U2.25 U2.27 U2.29 U2.30 U2.31 U2.32 U4.3 U5.5 U5.10
copper on no net: | length 73.7
  Top w0.254: v1(65.659,13.716) 72.263,7.112 75.692,7.112 76.327,6.477 v1(76.359,6.477)
  Bottom w0.152: 70.866,9.906 70.896,9.876 72.136,9.876 ; 72.644,9.876 72.653,9.876 ; 85.318,17.573 85.318,17.831
  Bottom w0.2: 51.562,8.448 52.793,9.679 52.793,12.153 53.242,12.602 53.242,13.462
  Bottom w0.254: 51.496,13.462 53.242,13.462 53.308,13.528 ; 51.562,6.792 51.562,8.448 ; 53.848,9.21 54.676,9.21 ; 53.914,11.176 53.914,12.512 54.93,13.528 55.912,13.528 ; 59.436,15.301 61.661,15.301 61.962,15 61.964,15 61.964,14.998 62.23,14.732 62.23,13.122 62.245,13.106 62.89,13.106 63.5,13.716 v1(65.659,13.716) ; 76.318,3.031 76.382,2.967 76.382,2.248 ; 84.318,3.031 84.318,3.302 ; 85.318,3.031 85.344,3.057 85.344,3.302 ; 101.506,11.712 102.047,12.319 ; 101.935,12.192 102.047,12.319 ; v4(102,15.5) 102.047,15.453 102.047,12.319
  Bottom w0.305: 76.318,3.031 76.359,3.072 v1(76.359,6.477)
  Bottom w0.508: 53.848,9.21 54.29,9.21 ; 53.848,11.11 53.914,11.176 ; 55.912,14.478 56.388,14.478 ; 70.866,9.906 72.614,9.906 72.644,9.876 72.136,9.876 ; 84.318,3.302 84.318,5.324 v1(84.328,5.334) ; 85.344,3.302 v1(85.344,5.334)
  Bottom w0.61: 56.388,14.478 56.642,14.478 57.15,13.97
  Bottom w0.75: 85.318,17.573 ccw(c88.881,17.573) 86.362,15.054 ccw(c88.365,17.057) 88.365,14.224 v5(90.678,14.224)
  Bottom w0.813: 57.033,12.937 57.15,13.054 57.15,13.97
  Bottom w1.016: 53.848,9.21 53.848,6.604 55.88,4.572 ; 55.485,11.98 55.963,12.458 56.554,12.458 57.033,12.937
  Bottom w1.27: 54.676,9.21 55.485,10.019 55.485,11.98
  other v1: 26,33 23.876,33.274 28.194,33.274 23.495,35.56 28.575,35.56 23.876,37.74 28.194,37.74 26,38
  other v2: 69.27,47.349
  other v3: 26,35.5

## Polygon pours and split planes (outlines as drawn)
GND on Top "Polygon_1_Net_GND" (solid, remove dead copper, pour order 4): 50.368,70.155 50.368,-4.115 175.311,-4.115 175.311,70.155
no net on Top "Polygon_1_Net_F1" (solid, remove dead copper, pour order 2): 19.228,39.16 36.525,39.16 36.525,-1.727 19.228,-1.727
GND on Bottom "Polygon_3_Net_GND" (solid, remove dead copper, pour order 3): 43.485,23.603 89.23,23.603 89.23,-0.552 43.485,-0.552
GND on Bottom "Polygon_2_Net_GND" (solid, remove dead copper, pour order 0): 102.362,-0.889 119.126,-0.889 119.126,9.779 102.362,9.779
no net on tPlace "Polygon_1_NoNet" (solid, pour order 1): 22.034,63.944 22.034,55.181 63.817,55.181 63.817,63.944

## Keep-outs
Keep-Out Layer:
  the board outline again, w0.025

## Silkscreen, mask and mechanical layers (free items; w line width, h text height)
Dimension:
  lines w0.025: 20.51,1.68 ccw(c22.129,1.681) 22.13,0.062 156.13,0.062 ccw(c156.13,1.681) 157.748,1.681 157.748,8.181 cw(c166.129,8.181) 166.129,16.562 172.63,16.562 ccw(c172.63,18.181) 174.249,18.181 174.249,48.181 ccw(c172.63,48.181) 172.63,49.8 166.129,49.8 cw(c166.129,58.181) 157.748,58.181 157.748,64.681 ccw(c156.13,64.681) 156.13,66.3 22.13,66.3 ccw(c22.165,64.646) 20.51,64.611 20.51,41 cw(c20.537,40.011) 21.526,39.973 21.526,12.914 cw(c20.561,12.902) 20.51,11.938 20.51,1.68 ; 70.916,47.675 ccw(c72.758,47.612) 72.694,45.77 115.112,45.77 ccw(c115.176,47.612) 117.017,47.548 117.017,55.168 ccw(c115.176,55.232) 115.239,57.073 72.821,57.073 ccw(c72.758,55.232) 70.916,55.295 70.916,47.675
tPlace:
  text "Agrilog_Rev8" at 23.146,50.07 h1.51
  text "Con莽u et fabriqu茅 par" at 23.146,44.736 h1.51
  text "Novations AGL, QC, Canada" at 23.146,42.069 h1.51
  text "GND" at 66,19.54 h1.51
  text "CLK" at 66,16.7 h1.51
  text "RESET" at 53.9,14.23 h1.51
  text "TX2" at 66,14.23 h1.51
  text "RX2" at 66,11.5 h1.51
  text "VCC" at 66,9.017 h1.51
  text "IO" at 66,6.382 h1.51
  text "GND" at 66,3.905 h1.51
bPlace:
  circle w0.254: c104.648,2.032 r0.568
  circle w0.254: c52.832,12.446 r0.568
Document:
  drawing of 203 lines, arcs and shapes, not listed
Reference:
  drawing of 315 lines, arcs and shapes, not listed

## Dimensions
29.408,34.532 to 154.432,33.782 on tFinish
20.511,35.681 to 29.337,30.353 on tFinish
71.374,47.752 to 96.774,31.877 on tFinish
115.697,57.15 to 115.57,45.847 on tFinish
71.374,55.372 to 117.475,55.245 on tFinish

## Text inside footprints (layer, text, board x,y; h text height)
F1: Measures "0.205in/5.207mm" at 19.268,19.695 h0.54; Measures "0.102in/2.604mm" at 17.998,20.991 h0.54; Measures "0in/0mm" at 52.542,19.695 h0.54; Measures "0.472in/11.989mm" at 39.182,33.919 h0.54; Measures "0.315in/8mm" at 34.508,25.664 h0.54; Measures "Alt Padstyle 2: OX90Y60D30P" at 28.692,-0.396 h1.08; Measures "Alt Padstyle 1: OX60Y90D30P" at 28.692,1.509 h1.08; Measures "Right Mtg Padstyle: RX50Y100D30P" at 25.999,3.414 h1.08; Measures "Left Mtg Padstyle: RX50Y100D30P" at 26.558,5.319 h1.08; Measures "3rd Mtg Padstyle: RX100Y50D40P" at 26.761,7.224 h1.08; Measures "2nd Mtg Padstyle: RX50Y100D40P" at 26.761,9.129 h1.08; Measures "1st Mtg Padstyle: RX80Y110D50P" at 26.965,11.034 h1.08; Measures "Default Padstyle: RX197Y236D0T" at 27.142,12.939 h1.08
L1: Measures "0.059in/1.499mm" at 60.096,-1.727 h0.54; Measures "0.205in/5.207mm" at 61.951,10.211 h0.54; Measures "0.205in/5.207mm" at 52.273,4.267 h0.54; Measures "Alt 2 Padstyle: OX90Y60D30P" at 72.72,-7.925 h1.08; Measures "Alt 1 Padstyle: OX60Y90D30P" at 72.72,-6.401 h1.08; Measures "Default Padstyle: RX73Y205D0T" at 73.685,-4.877 h1.08
U3: tDocu "*" at 53.569,14.326 h1.08 r180; Measures "0.02in/0.508mm" at 49.708,19.025 h0.54 r180; Measures "0.037in/0.95mm" at 42.748,14.326 h0.54 r180; Measures "0.118in/2.997mm" at 58.522,14.783 h0.54 r180; Measures "0.11in/2.794mm" at 50.851,8.661 h0.54 r180; Measures "0.067in/1.702mm" at 50.571,10.566 h0.54 r180; Measures "Alt 2 Padstyle: OX90Y60D30P" at 39.802,28.677 h1.08 r180; Measures "Alt 1 Padstyle: OX60Y90D30P" at 39.802,27.153 h1.08 r180; Measures "Pin One Padstyle: RX35p5Y20D0T" at 37.871,22.581 h1.08 r180; Measures "Default Padstyle: RX35p5Y20D0T" at 38.252,21.057 h1.08 r180; tPlace "*" at 52.476,13.157 h1.08 r180
U4: tDocu "*" at 105.385,3.912 h1.08 r180; Measures "0.02in/0.508mm" at 101.422,8.611 h0.54 r180; Measures "0.037in/0.95mm" at 94.513,3.912 h0.54 r180; Measures "0.118in/2.997mm" at 110.338,4.369 h0.54 r180; Measures "0.118in/2.997mm" at 102.387,-1.753 h0.54 r180; Measures "0.067in/1.702mm" at 102.387,0.152 h0.54 r180; Measures "Alt 2 Padstyle: OX90Y60D30P" at 91.618,18.263 h1.08 r180; Measures "Alt 1 Padstyle: OX60Y90D30P" at 91.618,16.739 h1.08 r180; Measures "Pin One Padstyle: RX39p5Y22D0T" at 89.687,12.167 h1.08 r180; Measures "Default Padstyle: RX39p5Y22D0T" at 90.068,10.643 h1.08 r180; tPlace "*" at 104.242,2.692 h1.08 r180
U5: tDocu "*" at 55.524,17.831 h1.08 r180; tDocu "*" at 55.524,17.831 h1.08 r180; tPlace "*" at 54.229,16.612 h1.08 r180; tPlace "*" at 54.229,16.612 h1.08 r180; Document "0.027in/0.686mm" at 51.054,23.673 h0.54 r180; Document "0.026in/0.65mm" at 44.501,17.551 h0.54 r180; Document "0.163in/4.14mm" at 61.874,18.847 h0.54 r180; Document "0.199in/5.055mm" at 53.238,12.141 h0.54 r180; Document "0.122in/3.099mm" at 53.238,14.072 h0.54 r180; Document "Alt 2 Padstyle: OX90Y60D30P" at 42.469,33.325 h1.08 r180; Document "Alt 1 Padstyle: OX60Y90D30P" at 42.469,31.801 h1.08 r180; Document "Pin One Padstyle: RX52p5Y17D0T" at 40.538,27.229 h1.08 r180; Document "Default Padstyle: RX52p5Y17D0T" at 40.919,25.705 h1.08 r180; Document "0.027in/0.686mm" at 51.054,23.673 h0.54 r180; Document "0.026in/0.65mm" at 44.501,17.551 h0.54 r180; Document "0.163in/4.14mm" at 61.874,18.847 h0.54 r180; Document "0.199in/5.055mm" at 53.238,12.141 h0.54 r180; Document "0.122in/3.099mm" at 53.238,14.072 h0.54 r180; Document "Alt 2 Padstyle: OX90Y60D30P" at 42.469,33.325 h1.08 r180; Document "Alt 1 Padstyle: OX60Y90D30P" at 42.469,31.801 h1.08 r180; Document "Pin One Padstyle: RX52p5Y17D0T" at 40.538,27.229 h1.08 r180; Document "Default Padstyle: RX52p5Y17D0T" at 40.919,25.705 h1.08 r180